# Altium PCB 1.0_evm.PcbDoc
Units mil, origin at the board's own origin, x right, y up, seen from the top; angles counter-clockwise.
Board outline 1585 x 1435 mil, 2 copper layers (Top Layer, Bottom Layer); 28 components, 19 nets, 92 pads, 81 vias.
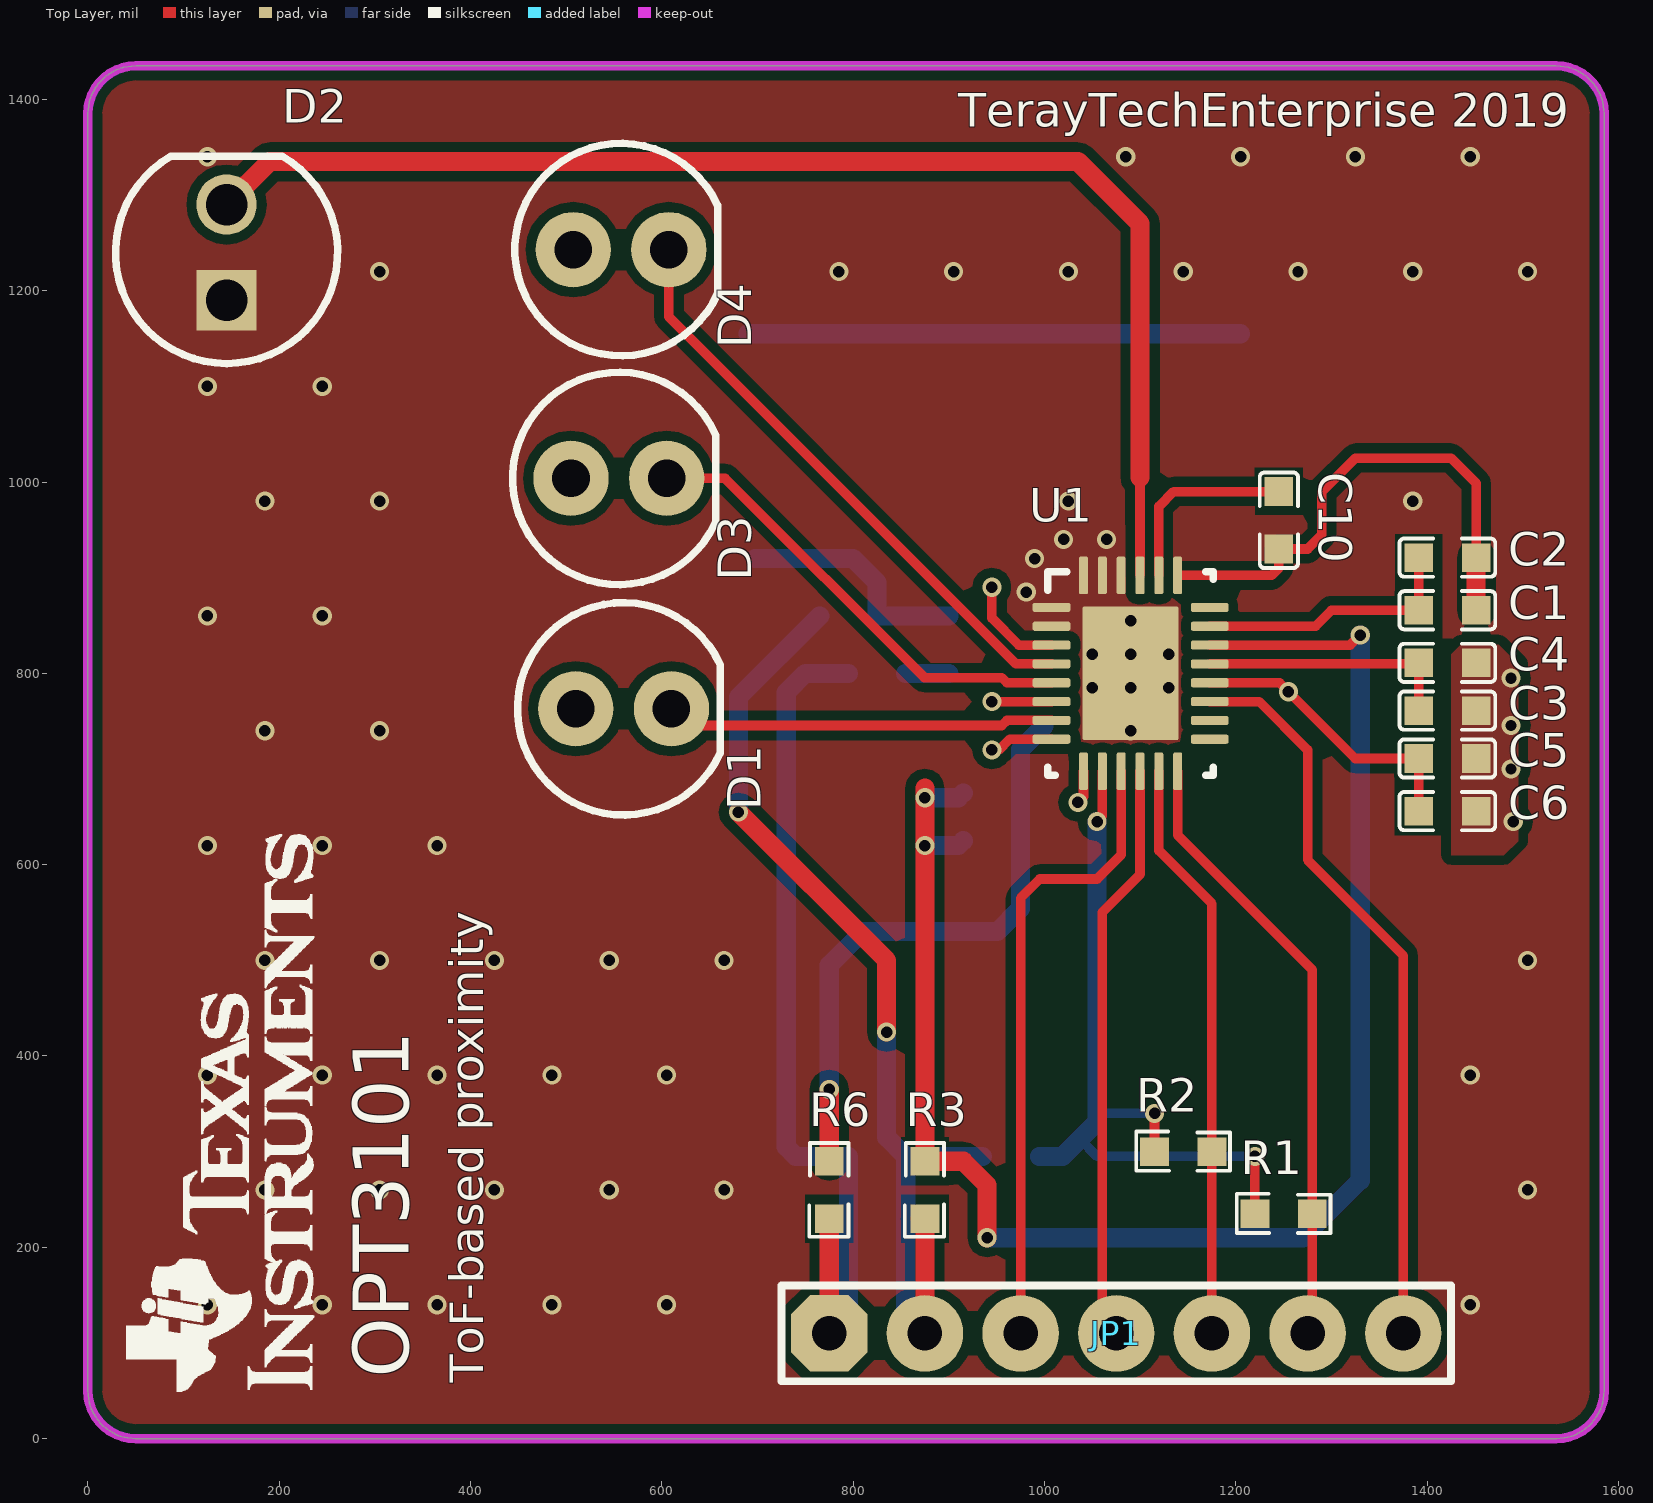
[diagram p0: Top Layer view]
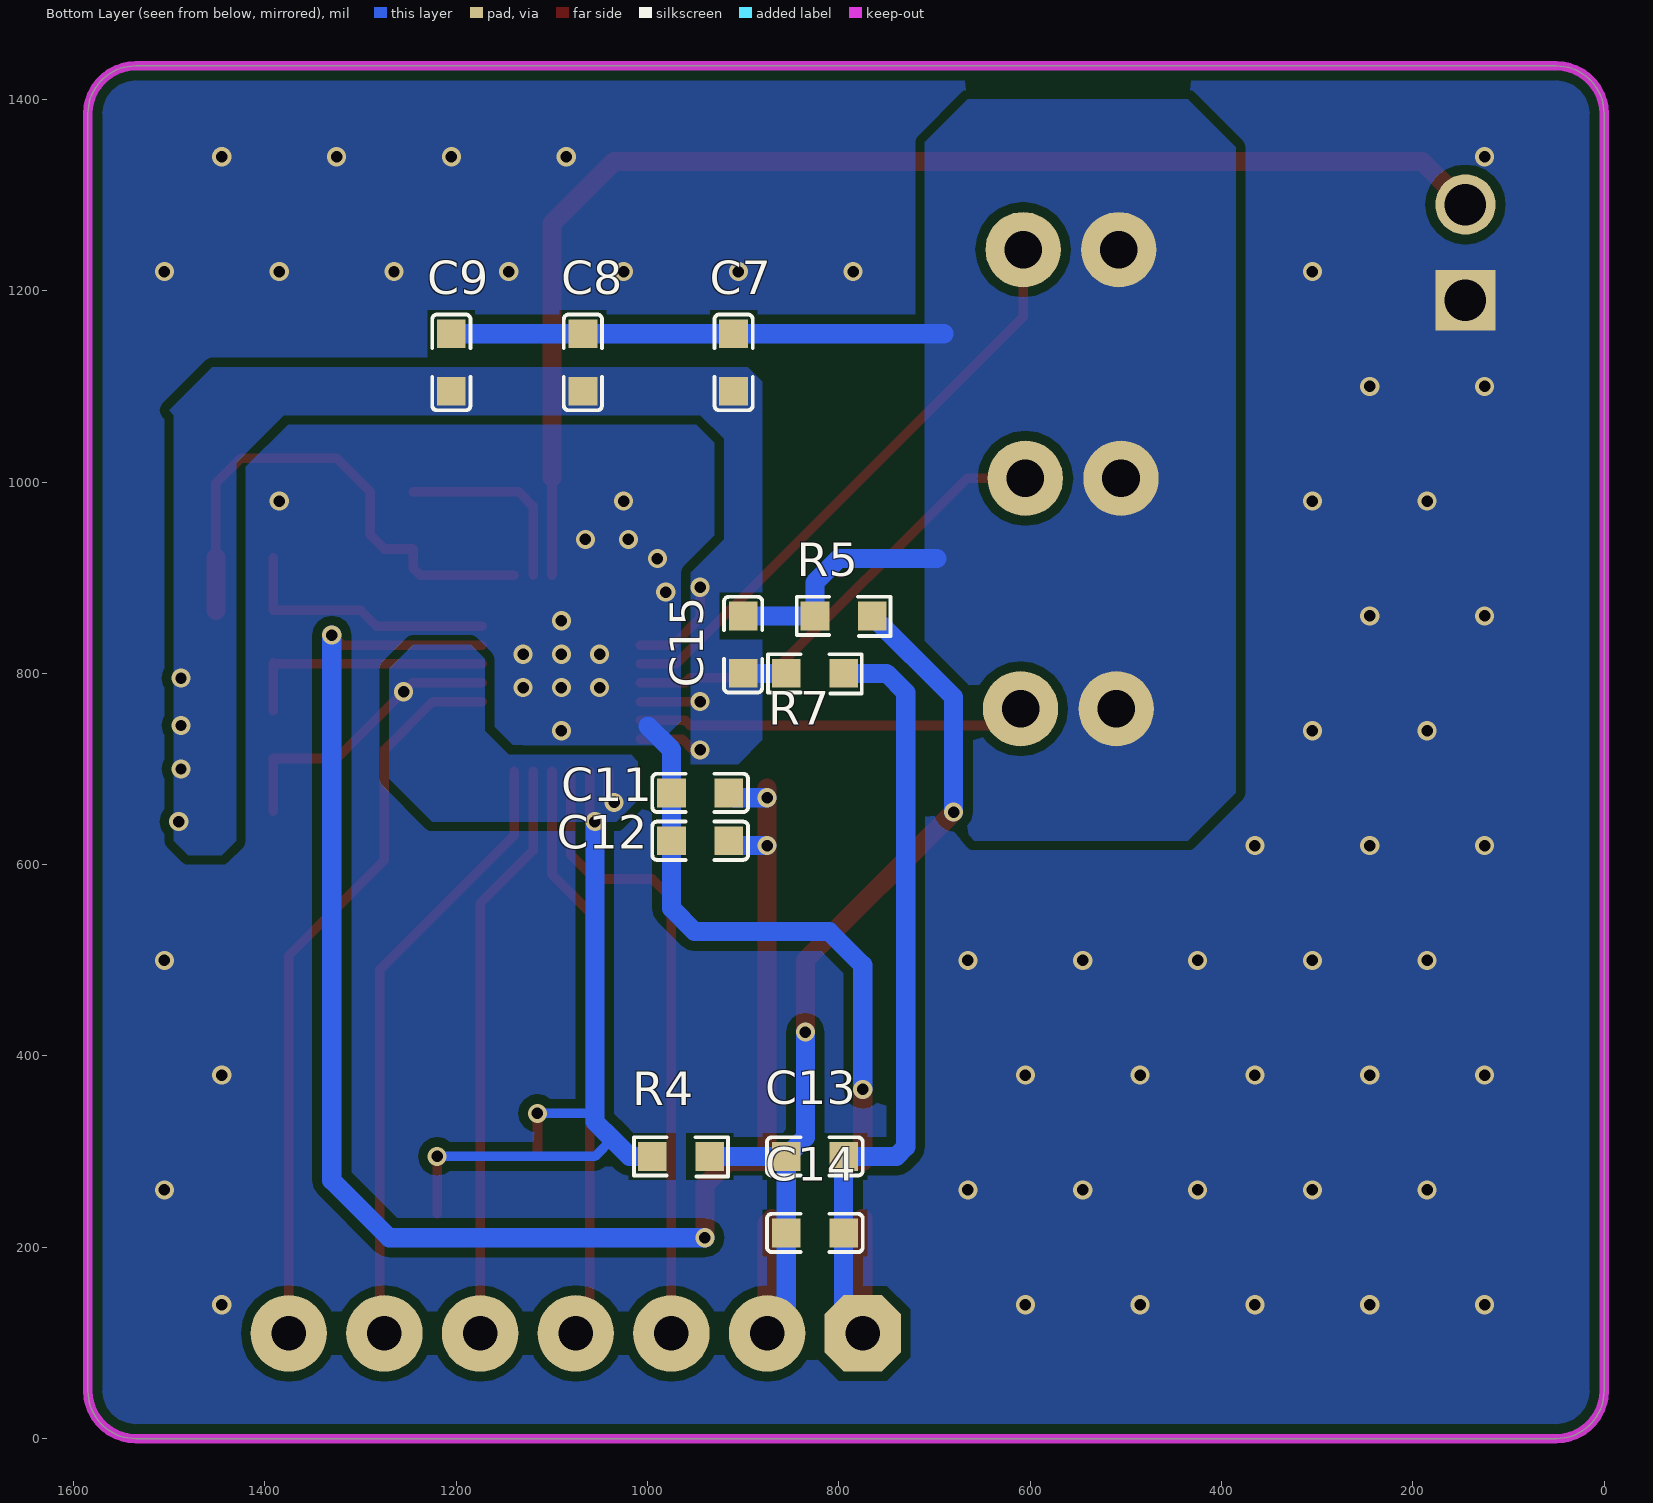
[diagram p1: Bottom Layer view, seen from below]
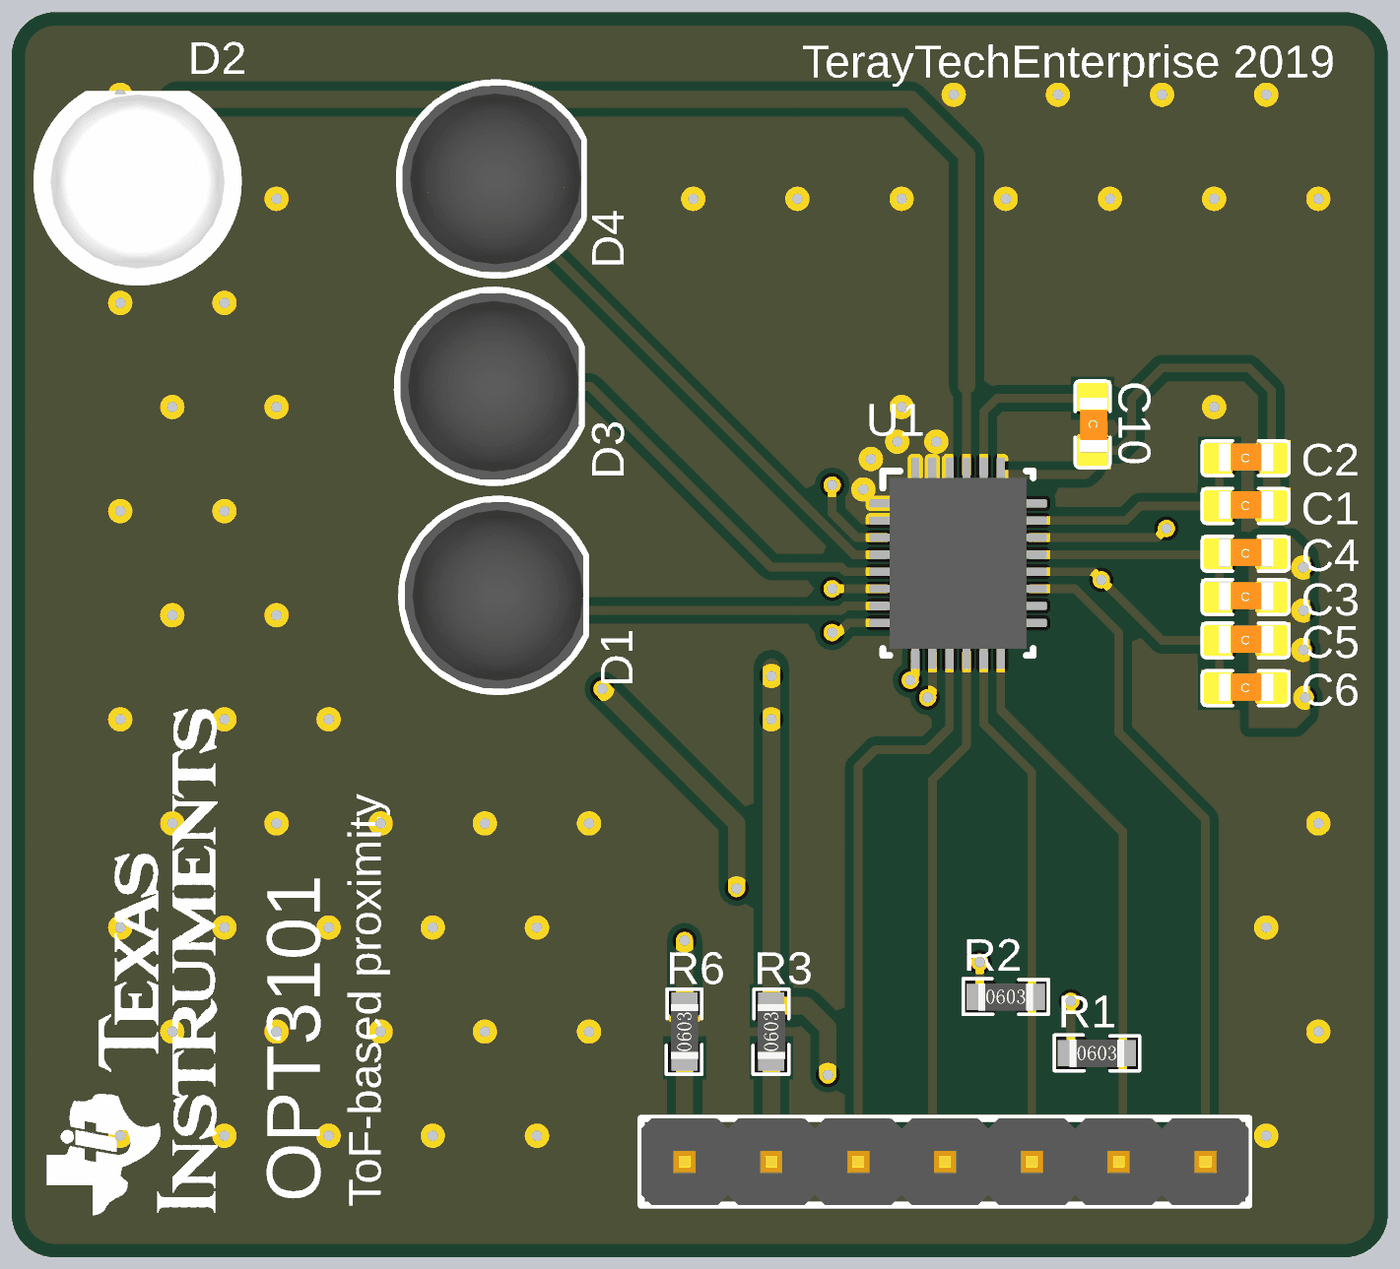
[diagram p2: 3D render of the assembled board from above, using the file's embedded part models]
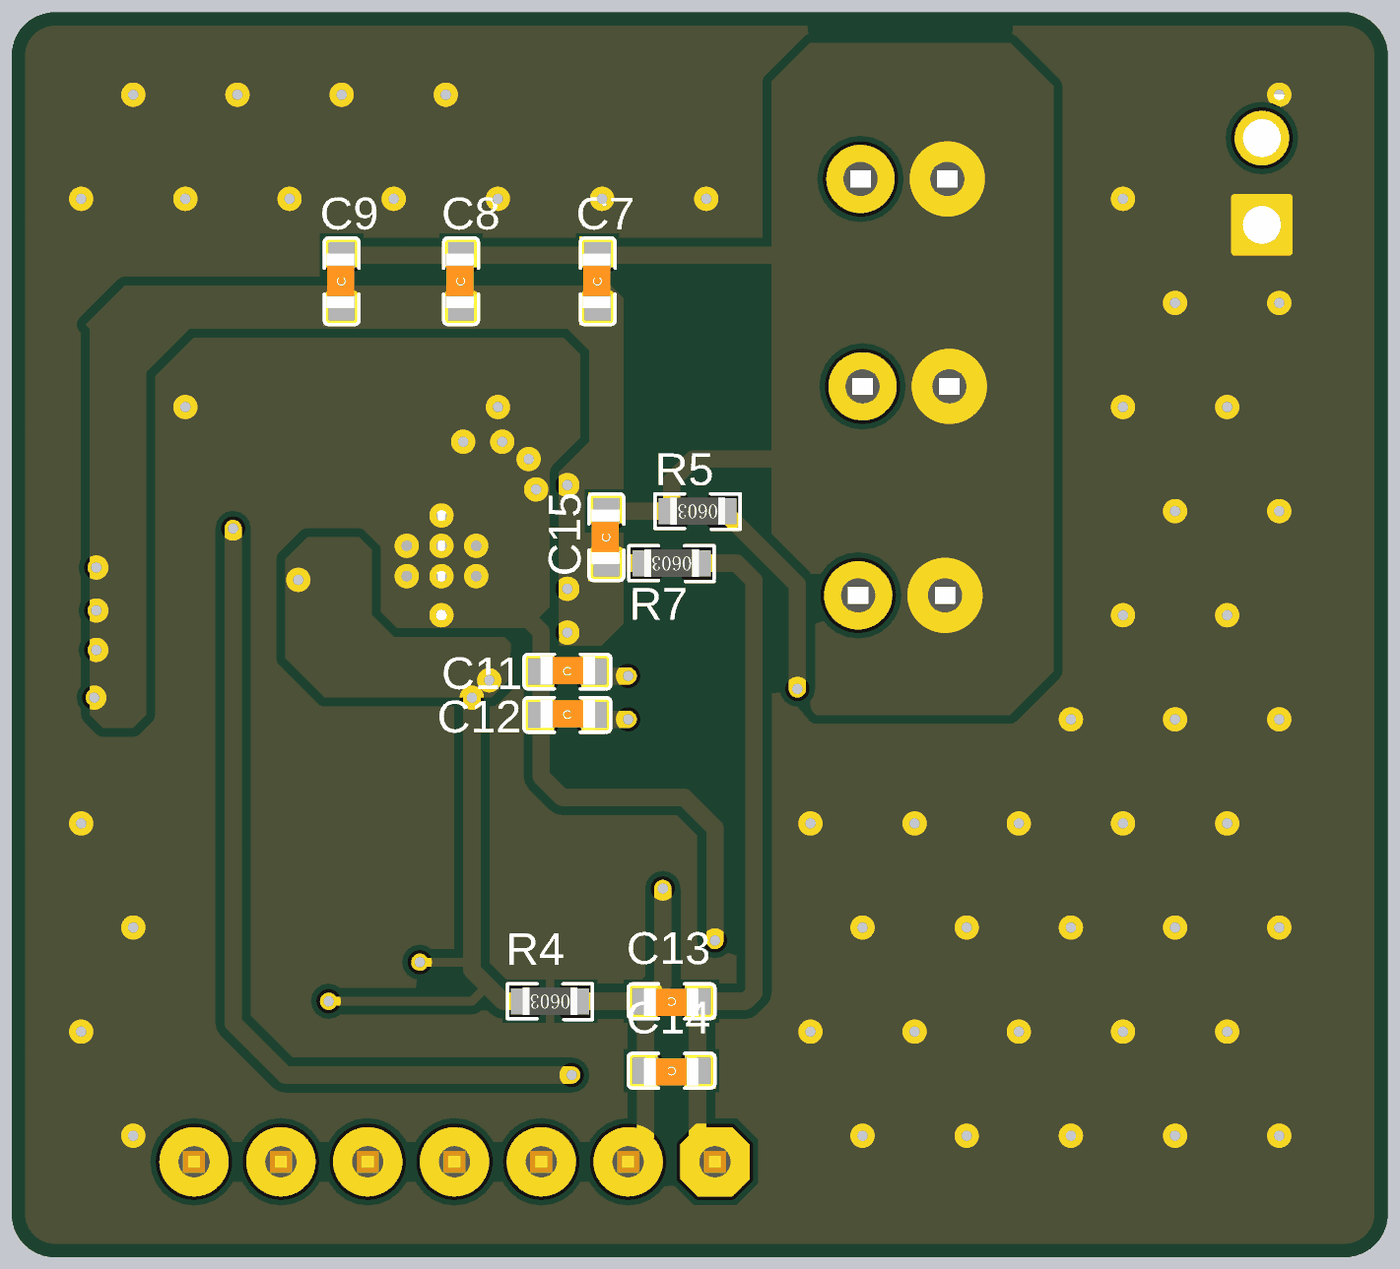
[diagram p3: 3D render of the assembled board from below, using the file's embedded part models]

## Layer stack, top to bottom
Top Solder: solder mask 0.4, Solder Resist, Dk 3.5
Top Layer: signal copper 1.4
Dielectric 1: dielectric 12.6, FR-4, Dk 4.8
Bottom Layer: signal copper 1.4
Bottom Solder: solder mask 0.4, Solder Resist, Dk 3.5

## Board outline
0,50 0,1385 cw(c50,1385) 50,1435 1535,1435 cw(c1535,1385) 1585,1385 1585,50 cw(c1535,50) 1535,0 50,0 cw(c50,50)

## Design rules (kind name [scope] priority, off if disabled: settings)
Clearance [All] p1: gap=10 ignorepadtopadclearanceinfootprint=FALSE except(0: Arc-Hole Track-Hole SMDPad-Hole THPad-Hole Via-Hole Fill-Hole Poly-Hole Region-Hole Text-Hole; 6: Arc-Arc Arc-Track Arc-SMDPad Track-Track Track-SMDPad SMDPad-SMDPad)
MatchedLengths MatchLengths_U1_Passives_D1,D2,D3,D4 [InxSignalClass('xSignals_U1_Passives_D1,D2,D3,D4_MatchLengthsClass')] p1: tolerance=100 checknetsindiffpair=FALSE checkdiffpairvsdiffpair=TRUE checkxsignals=TRUE checkothers=TRUE
MatchedLengths MatchLengths_xSignals_U1_Passives [InxSignalClass('xSignals_U1_Passives_MatchLengthsClass')] p2: tolerance=100 checknetsindiffpair=FALSE checkdiffpairvsdiffpair=TRUE checkxsignals=TRUE checkothers=TRUE
MatchedLengths MatchLengths_xSignals_U1_D1,D2,D3,D4 [InxSignalClass('xSignals_U1_D1,D2,D3,D4_MatchLengthsClass')] p3: tolerance=100 checknetsindiffpair=FALSE checkdiffpairvsdiffpair=TRUE checkxsignals=TRUE checkothers=TRUE
PolygonConnect [All] p1: connectstyle=Direct reliefconductorwidth=10 reliefentries=4 polygonreliefangle="90 Angle" airgapwidth=10
RoutingVias [All] p1: holewidth=28 width=50 viastyle="Through Hole" minholewidth=28 minwidth=50 maxholewidth=28 maxwidth=50
SolderMaskExpansion [All] p1: expansion=4
Width [All] p1: maxlimit=20 minlimit=10 preferedwidth=10 minimp=50.000000 maximp=50.000000 favimp=50.000000
30 further rules are at their usual default settings.

## Components (designator, comment, footprint, x,y, rotation, side; value= is the part's Value field where it differs from the comment)
C1 "1uF" 0603_C 1421.18,865.94 r0 top value=104
C2 "0.1uF" 0603_C 1421.18,920.94 r0 top value=104
C3 "1uF" 0603_C 1421.18,760.94 r0 top value=104
C4 "0.1uF" 0603_C 1421.18,810.94 r0 top value=104
C5 "1uF" 0603_C 1421.18,710.94 r0 top value=104
C6 "0.1uF" 0603_C 1421.18,655.94 r0 top value=104
C7 "0.1uF" 0603_C 910,1125 r90 bottom value=104
C8 "0.1uF" 0603_C 1067.5,1125 r90 bottom value=104
C9 "0.1uF" 0603_C 1205,1125 r90 bottom value=104
C10 "5.8pF" 0603_C 1245,960 r270 top value=104
C11 "1uF" 0603_C 945,675 r180 bottom value=104
C12 "0.1uF" 0603_C 945,625 r180 bottom value=104
C13 "1uF" 0603_C 825,295 r0 bottom value=104
C14 "0.1uF" 0603_C 825,215 r0 bottom value=104
C15 "1uF" 0603_C 900,830 r90 bottom value=104
D1 "SFH 4556" SFH4556 560,762.91 r0 top value=Infrared
D2 "SFH203PFA" SFH_213 145,1240 r90 top
D3 "SFH 4556" SFH4556 555,1003.82 r0 top value=Infrared
D4 "SFH 4556" SFH4556 557.35,1242.91 r0 top value=Infrared
JP1 "header" header7 775,110 r0 top
R1 "2.20k" 0603_R 1250,235 r0 top value=1K
R2 "2.20k" 0603_R 1145,300 r0 top value=1K
R3 "0" 0603_R 875,260 r90 top value=1K
R4 "0" 0603_R 965,295 r0 bottom value=1K
R5 "0" 0603_R 795,860 r0 bottom value=1K
R6 "0" 0603_R 775,260 r90 top value=1K
R7 "0" 0603_R 825,800 r0 bottom value=1K
U1 "OPT3101RHFR" VQFN-28 1090,800 r0 top

## Footprints (in the part's own frame and the unit in brackets; to place one, negate y for a bottom-side part, rotate by r counter-clockwise, add the part's x,y. Pads: shape width x height; smd on the part's side, far side on the other; paste and mask are expansions set on the pad)
0603_C [mil] "Capacitor"
  rect 30x30 smd: 1(-30,0) 2(30,0)
  silkscreen extent -50,-20 50,20, body extent -51,-18 52,21, height 35
0603_R [mil]
  rect 30x30 smd: 1(-30,0) 2(30,0)
  silkscreen extent -49,-20 49,21, body extent -32,-16 31,16, height 18
header7 [mil]
  oct 80x80 hole 36: 1(0,0)
  round 80 hole 36: 2(100,0) 3(200,0) 4(300,0) 5(400,0) 6(500,0) 7(600,0)
  silkscreen extent -50,-50 650,50, body extent -50,-50 650,50, height 398
SFH4556 [mm] "TH, 2-Leads, Dia 5.5mm, Pin Spacing 2.54mm"
  round 2 hole 1: 1(-1.27,0) 2(1.27,0)
  silkscreen extent -2.82,-2.82 2.57,2.82, body extent -2.75,-2.75 2.5,2.75, height 10.7
SFH_213 [mm] "TH, 2-Leads, Dia 5.7mm, Pin Spacing 2.54mm"
  rect 1.6x1.6 hole 1.1: 1(-1.27,0)
  round 1.6 hole 1.1: 2(1.27,0)
  silkscreen extent -2.95,-2.95 2.55,2.95, body extent -2.95,-2.95 2.55,2.95, height 11.4
VQFN-28 [mm] "QFN, 28-Leads, Body 5x4mm, Pitch 0.5mm, Thermal Pad 3.55x2.55mm"
  rrect42% 1x0.24 smd: 1(-2.1,1.75) 2(-2.1,1.25) 3(-2.1,0.75) 4(-2.1,0.25) 5(-2.1,-0.25) 6(-2.1,-0.75) 7(-2.1,-1.25) 8(-2.1,-1.75) 15(2.1,-1.75) 16(2.1,-1.25) 17(2.1,-0.75) 18(2.1,-0.25) 19(2.1,0.25) 20(2.1,0.75) 21(2.1,1.25) 22(2.1,1.75)
  rrect42% 0.24x1 smd: 9(-1.25,-2.6) 10(-0.75,-2.6) 11(-0.25,-2.6) 12(0.25,-2.6) 13(0.75,-2.6) 14(1.25,-2.6) 23(1.25,2.6) 24(0.75,2.6) 25(0.25,2.6) 26(-0.25,2.6) 27(-0.75,2.6) 28(-1.25,2.6)
  rrect50% 1.13x1.53 on Top Paste: 29(-0.665,-0.865) 29(-0.665,0.865) 29(0.665,-0.865) 29(0.665,0.865)
  rrect4% 2.55x3.55 smd paste-3.55: 29(0,0)
  silkscreen extent -2.2,-2.7 2.2,2.7, body extent -2,-2.5 2,2.5, height 1

## Part data
C1 C2 C3 C4 C5 C6 C7 C8 C9 C10 C11 C12 C13 C14 C15: library part CAP, "Capacitor", LatestRevisionDate=17-Jul-2002, LatestRevisionNote="Re-released for DXP Platform.", PackageReference=RAD-0.3, Published=8-Jun-2000, Publisher="Altium Limited"
D1 D3 D4: "LED, Infrared, TH", Color=Infrared, Manufacturer=OSRAM, Power_TotalModule=180mW, Supplier Part Number 1=475-2871-ND, Value1=.18W, Value2=1.5V, Angle=40, ComponentLink1Description="Datasheet link", ComponentLink1URL=http://www.osram-os.com/Graphics/XPic7/00209781_0.pdf, CompType=LED, Io_A=1dA, LatestRevisionDate=2017-10-03, MountType=TH, PackageReference=D5.5mm, PartNumber="SFH 4556", Published=2008-07-11, Publisher="Texas Instruments", RoHS=Y, SizeArea_mm2=28.4625, SizeAreaWB_mm2=53.8125, SizeX_mm=5.175, SizeY_mm=5.5, SizeZ_mm=11.1, Supplier 1=Digi-Key, Supplier 2=Mouser, Supplier Part Number 2=720-SFH4556, Type=?, U/M=EA, Vf_V=1.5V, Vr_V=5V
D2: "Silicon PIN Photodiode, TH", Manufacturer=OSRAM, ComponentLink1Description="Datasheet URL", ComponentLink1URL=https://dammedia.osram.info/media/resource/hires/osram-dam-5488335/SFH%20203%20PFA_EN.pdf, CompType="Photo Diode", MountType=TH, PackageReference="TH, 2-Leads, Dia 5.7mm", PartNumber=SFH203PFA, RoHS=Y, SizeArea_mm2=32.49, SizeAreaWB_mm2=59.29, SizeX_mm=5.7, SizeY_mm=5.7, SizeZ_mm=7.75
JP1: library part "HEADER 7"
R1 R2 R3 R4 R5 R6 R7: library part RES, "Resistor", Published=8-Jun-2000, Publisher="Altium Limited", Revision="July-2002: Re-released for DXP Platform."
U1: "Long Range Proximity/Depth Sensor, RHF0028A (VQFN-28)", Alternate Manufacturer="Texas Instruments", Alternate PartNumber=OPT3101RHFT, ComponentLink1Description="Datasheet Link", ComponentLink1URL=https://sps06.itg.ti.com/sites/KMS/crossdivteams/altium/docs/ComponentDatasheets/OPT3101_Customer_Datasheet_v2p2.pdf, CompType=IC, LatestRevisionDate=2017-06-23, Manufacturer="Texas Instruments", MountType=SMT, PackageDescription=VQFN-28, PackageReference=RHF0028A, PartNumber=OPT3101RHFR, Publisher="Texas Instruments", SizeArea_mm2=20.0, SizeAreaWB_mm2=42.0, SizeX_mm=4.0, SizeY_mm=5.0, SizeZ_mm=1.0, U/M=EA

## Via types
v1: diameter 20, hole 12, Top Layer to Bottom Layer, 81 vias

## Nets (pads, with @x,y where several pads share a name; then routed paths per layer and width w, separated by ;. In a path a pad name is that pad's centre, name@x,y a point inside that pad or via, vN(x,y) a via of type N, cw(c..) or ccw(c..) an arc to the next point about the centre after c; other vN are vias at no path point)
AVDD_3V3: C11.2 C12.2 R3.2 U1.20 | length 1751
  Top Layer w10: U1.20 1319.53,829.53 v1(1330,840)
  Top Layer w20: 875,680 v1(875,670) v1(875,620) R3.2 915,290 940,265 v1(940,210)
  Bottom Layer w20: v1(875,620) 910,620 C12.2 ; v1(875,670) 910,670 C11.2 ; v1(940,210) 1270,210 1330,270 v1(1330,840)
AVSS: C1.2 C2.2 C10.2 C11.1 C12.1 D2.1 R6.2 U1.1 U1.2 U1.23 U1.26 U1.27 U1.28 U1.29@1090,800 | length 1175
  Top Layer w10: U1.23 1237.36,902.36 1245,910 C10.2 1275,930 1290,945 1290,990 1325,1025 1370,1025 1425,1025 1451.18,998.82 C2.2
  Top Layer w20: R6.2 v1(775,365) ; C1.2 C2.2
  Bottom Layer w20: v1(775,365) 775,495 810,530 950.72,530 975,554.28 C12.1 C11.1 975,720.38 999.62,745
  other v1: 125,140 245,140 365,140 485,140 605,140 1445,140 185,260 305,260 425,260 545,260 665,260 1505,260 125,380 245,380 365,380 485,380 605,380 1445,380 185,500 305,500 425,500 545,500 665,500 1505,500 125,620 245,620 365,620 185,740 305,740 1090,740 1050,785 1090,785 1130,785 1050,820 1090,820 1130,820 1090,855 125,860 245,860 980.98,885 989.62,920 1020,940 1065,940 185,980 305,980 1025,980 1385,980 125,1100 245,1100 305,1220 785,1220 905,1220 1025,1220 1145,1220 1265,1220 1385,1220 1505,1220 125,1340 1085,1340 1205,1340 1325,1340 1445,1340
GP1: JP1.3 U1.11 | length 666.3
  Top Layer w10: JP1.3 975,565 995,585 1055,585 1080.16,610.16 U1.11
GP2: JP1.4 U1.12 | length 610
  Top Layer w10: JP1.4 1060.47,124.53 1060.47,550.47 1099.84,589.84 U1.12
INM: C10.1 U1.24 | length 204
  Top Layer w10: U1.24 1119.53,974.53 1135,990 C10.1
INP: D2.2 U1.25 | length 1368.1
  Top Layer w10: U1.25 1099.84,1004.84
  Top Layer w20: D2.2 190,1335 1035,1335 1099.84,1270.16 1099.84,1004.84
IOVDD: C5.1 C6.1 R1.1 R2.1 R4.2 U1.9 U1.10 U1.18 | length 1137.7
  Top Layer w10: v1(1035,665) 1040.79,670.79 U1.9 ; v1(1055,645) 1060.47,650.47 U1.10 ; R2.1 v1(1115,340) ; U1.18 1245.63,790.16 1324.84,710.94 C5.1 C6.1 ; R1.1 v1(1220,295)
  Bottom Layer w10: 1036.86,313.14 1055,295 v1(1220,295) ; 1055,345 1060,340 v1(1115,340)
  Bottom Layer w20: R4.2 1018.72,295 1036.86,313.14 1055,331.28 1055,345 v1(1055,645)
  other v1: 1255,780.79
IOVSS: C3.2 C4.2 C5.2 C6.2 C7.1 C8.1 C9.1 C15.1 R7.2 U1.3 U1.6 U1.8 | length 280.6
  Top Layer w10: v1(945,720) 952.51,720 963.61,731.1 U1.8 ; v1(945,770.47) U1.6 ; v1(945,890) 945,857.63 973.1,829.53 U1.3
  Bottom Layer w20: R7.2 C15.1
  other v1: 1490,645 1487.66,700 1487.66,745.47 1487.66,795
NetC1_1: C1.1 C2.1 U1.21 | length 280.4
  Top Layer w10: U1.21 1283.27,849.21 1300,865.94 C1.1 C2.1
NetC3_1: C3.1 C4.1 U1.19 | length 269
  Top Layer w10: U1.19 1390.08,809.84 C4.1 C3.1
SCL: JP1.5 R2.2 U1.13 | length 610.6
  Top Layer w10: U1.13 1119.53,614.69 1175,559.21 R2.2 JP1.5
SDA: JP1.6 R1.2 U1.14 | length 648
  Top Layer w10: U1.14 1139.21,630.79 1280,490 1280,115 JP1.6
TX0: D1.2 U1.7 | length 406.7
  Top Layer w10: D1.2 627.44,745.47 955.36,745.47 960.67,750.79 U1.7
TX1: D3.2 U1.5 | length 490.8
  Top Layer w10: D3.2 666.18,1003.82 874.53,795.47 955.36,795.47 960.67,790.16 U1.5
TX2: D4.2 U1.4 | length 620.5
  Top Layer w10: D4.2 607.35,1172.65 970.16,809.84 U1.4
VDD_3V3: C13.2 C14.2 JP1.2 R3.1 R4.1 R5.1 | length 1068.1
  Top Layer w20: v1(680,655) 835,500 v1(835,425) ; R3.1@870,230 875,225 JP1.2
  Bottom Layer w20: v1(680,655) 680,775 R5.1 ; v1(835,425) 835,315 C13.2 ; JP1.2 855,130 C14.2 C13.2 ; R4.1 C13.2
VDDL: C7.2 C8.2 C9.2 C15.2 D1.1 D3.1 D4.1 R5.2 | length 762.9
  Bottom Layer w20: 690,1155 C7.2 C8.2 C9.2 ; 697.5,920 800,920 825,895 R5.2 C15.2
VSS_IN: C13.1 C14.1 JP1.1 R6.1 R7.1 | length 930.7
  Top Layer w20: JP1.1 R6.1
  Bottom Layer w20: JP1.1 795,130 C14.1 C13.1 740,295 730,305 730,780 750,800 R7.1
VSYNC_RST: JP1.7 U1.17 | length 774.7
  Top Layer w10: U1.17 1224.53,770.47 1275,720 1275,605 1375,505 JP1.7
pads on no net: U1.15 U1.16 U1.22 U1.29@1063.82,765.94 U1.29@1063.82,834.06 U1.29@1116.18,765.94 U1.29@1116.18,834.06

## Polygon pours and split planes (outlines as drawn)
AVSS on Bottom Layer (solid, remove dead copper, pour order 20): -40,1495 -55,1480 -55,-50 1685,-50 1700,-35 1630,35 1630,1510
VDDL on Bottom Layer (solid, pour order 6): 435,625 385,675 385,1350 435,1400 665,1400 710,1355 710,670 665,625
IOVSS on Bottom Layer (solid, pour order 12): 955,730 955,705 905.38,705 880,730.38 880,1105 895,1120 1455,1120 1500,1075 1495,1070 1495,625 1480,610 1445,610 1430,625 1430,1020 1380,1070 945,1070 920,1045 920,940 955,905
IOVDD on Bottom Layer (solid, pour order 10): 1010,715 1145,715 1170,740 1170,815 1185,830 1245,830 1270,805 1270,690 1225,645 1032.5,645 1011,666.5
AVSS on Bottom Layer (solid, pour order 2): 1130,725 1155,750 1155,935 1135,955 1000,955 965,920 965,750 990,725
AVSS on Top Layer (solid, remove dead copper, pour order 22): -40,1495 -40,65 50,-25 55,-20 1640,-20 1640,1410 1580,1470
IOVSS on Top Layer (solid, pour order 14): 1475,830 1495,810 1495,624.69 1480.31,610 1425,610 1425,820 1435,830
AVSS on Top Layer (solid, pour order 4): 1090,880 1035,880 1030,875 1030,845 1025,840 975,840 965,850 965,920 1000,955 1090,955

## Keep-outs
Keep-Out Layer:
  lines w10: 0,50 ccw(c50,50) 50,0 1535,0 ccw(c1535,50) 1585,50 1585,1345 1585,1385 ccw(c1535,1385) 1535,1435 50,1435 ccw(c50,1385) 0,1385 0,50

## Silkscreen, mask and mechanical layers (free items; w line width, h text height)
Top Overlay:
  drawing of 2754 lines, arcs and shapes, not listed
  text "TerayTechEnterprise 2019" at 910,1360 h60
  text "OPT3101" at 355,63.6 h100 r90
  text "ToF-based proximity" at 425,58.2 h60 r90